# Altium PCB Walrus.PcbDoc (part 1 of 3)
Units mm, origin at the board's own origin, x right, y up, seen from the top; angles counter-clockwise.
Board outline 65 x 30.33 mm, 2 copper layers (Top, Bottom), stack 1.545 mm thick; 106 components, 76 nets, 395 pads, 305 vias.
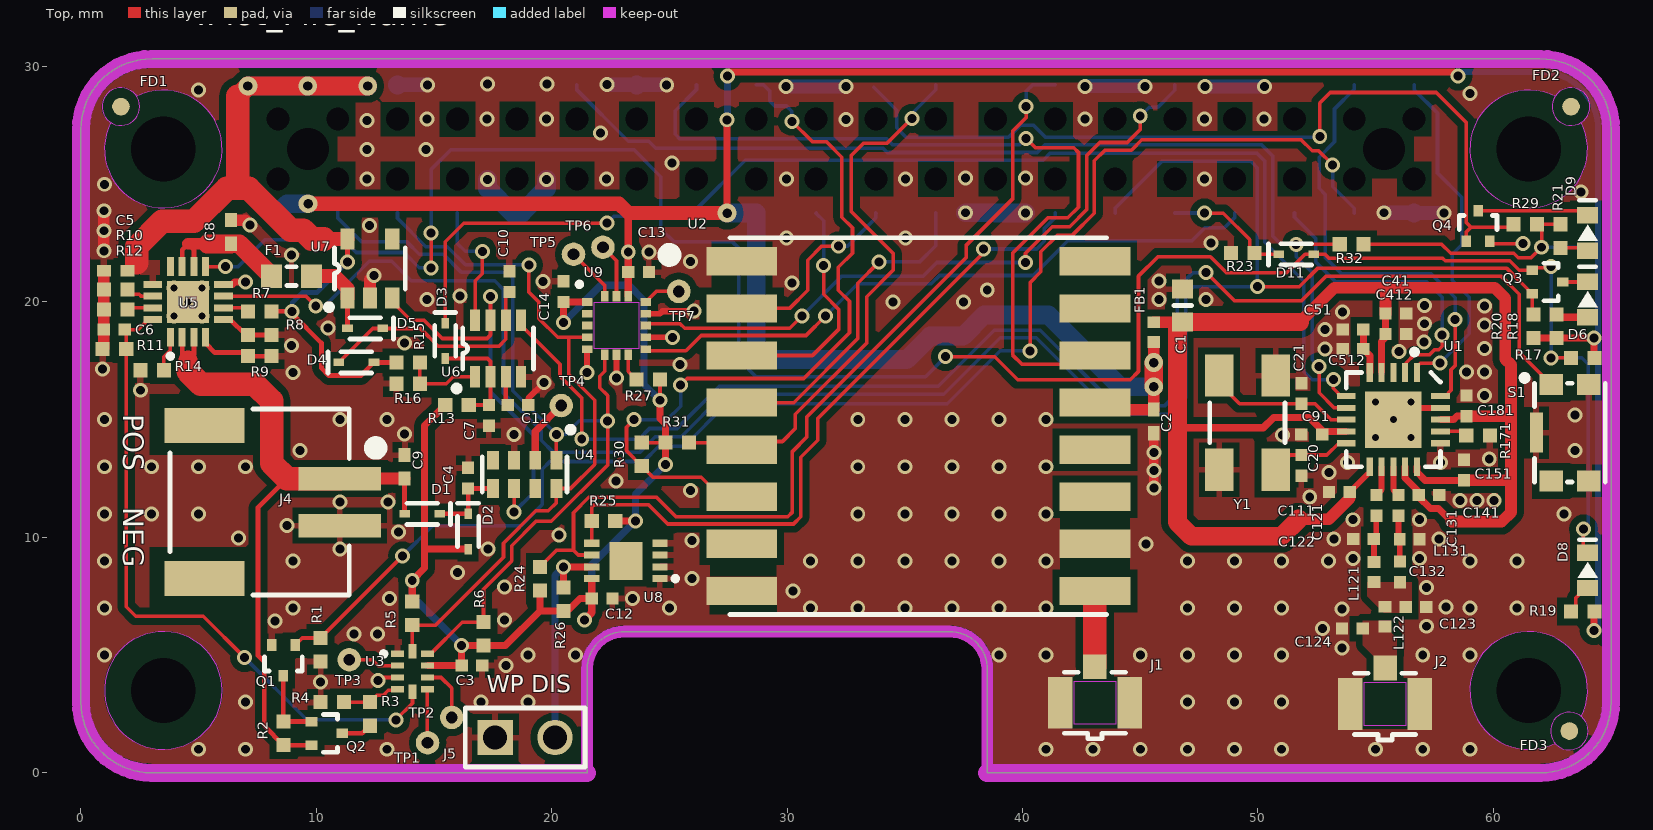
[diagram p0: Top view]
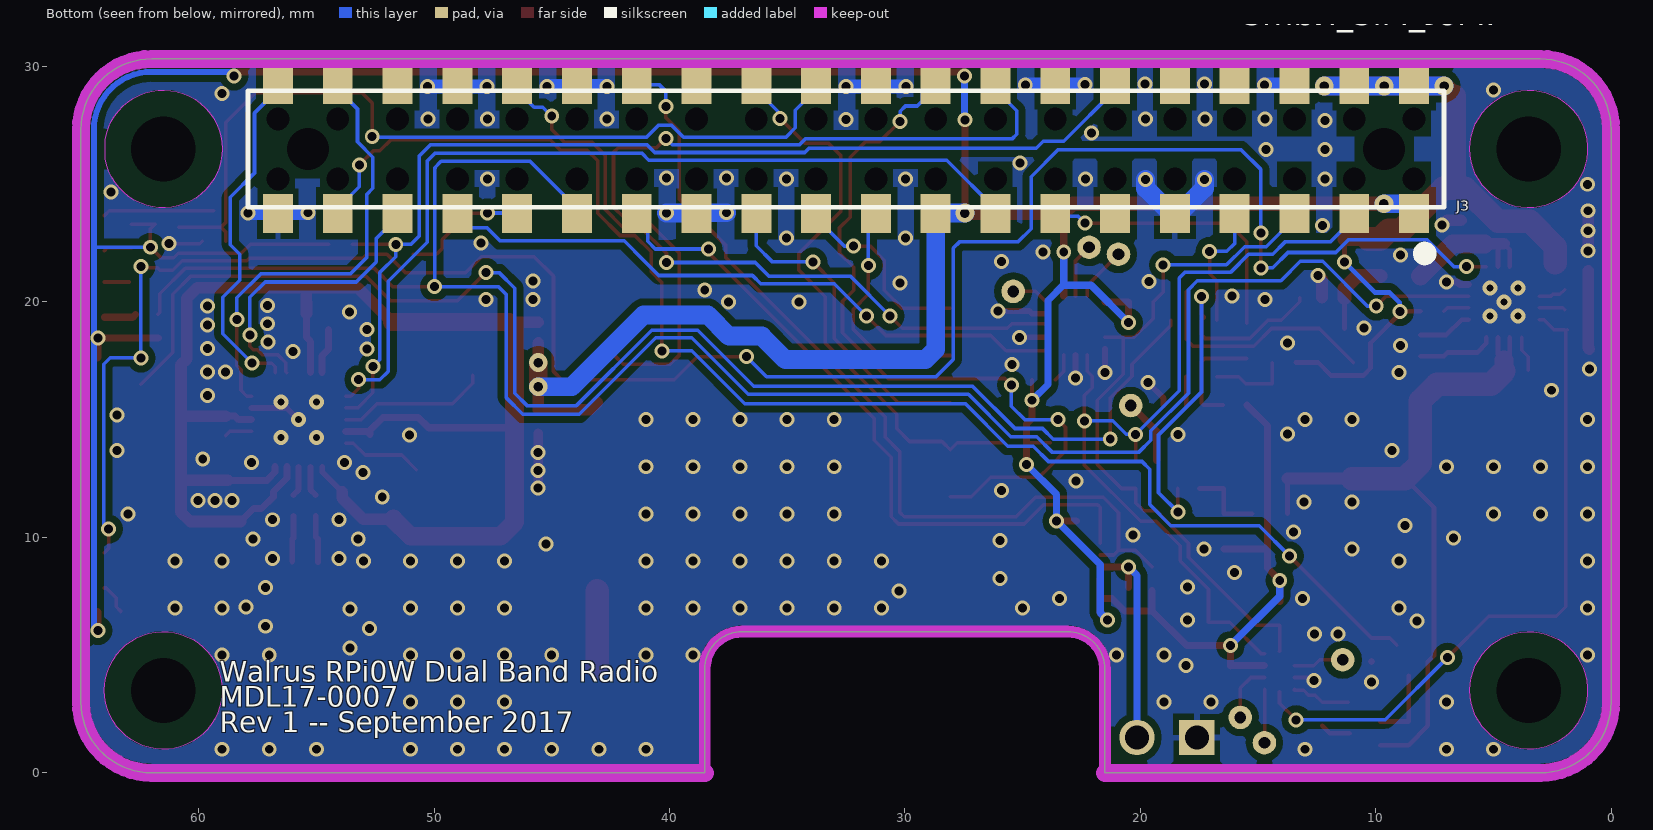
[diagram p1: Bottom view, seen from below]
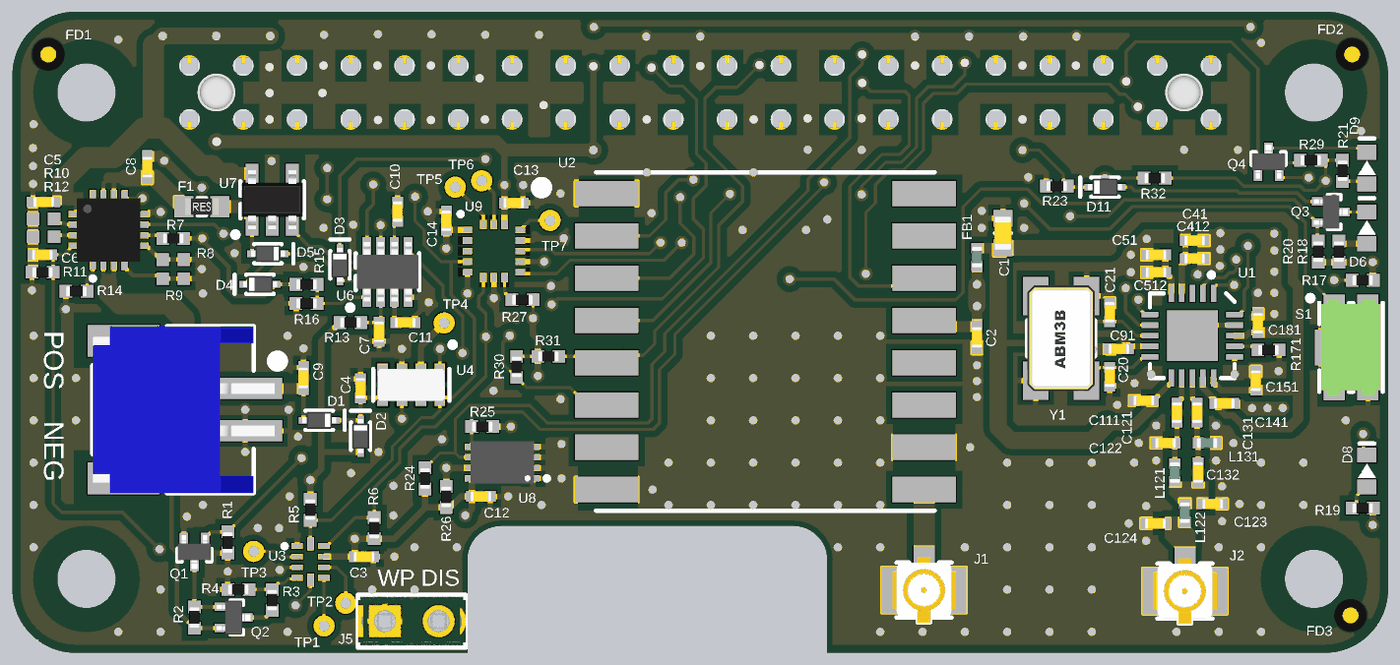
[diagram p3: 3D render of the assembled board from above, using the file's embedded part models]

## Layer stack, top to bottom
Top Solder: solder mask 0.02, Green, Gloss, Dk 4.71
Top: signal copper 0.035
Preg: core 1.475, FR4, Dk 4.2
Bottom: signal copper 0.035
Bottom Solder: solder mask 0.02, Green, Gloss, Dk 4.71

## Board outline
3,0 cw(c3,3) 0,3 0,27.325 cw(c3,27.325) 3,30.325 62,30.325 cw(c62,27.325) 65,27.325 65,3 cw(c62,3) 62,0 38.5,0 38.5,4.412 ccw(c36.912,4.412) 36.912,6 23.088,6 ccw(c23.088,4.412) 21.5,4.412 21.5,0

## Design rules (kind name [scope] priority, off if disabled: settings)
AssemblyTestPointUsage [All] p1: valid=2
AssemblyTestpoint [All] p1: testpointundercomponent=TRUE minsize=0.7 maxsize=2 preferedsize=0.8 minholesize=0 maxholesize=1 preferedholesize=0.4 testpointgrid=0.025 usegrid=FALSE gridtolerance=0 allowsidebottom=TRUE minspacing=0.75
Clearance "Copper to PTH" [InPadClass('MTGH')] p1: gap=0.255 ignorepadtopadclearanceinfootprint=FALSE except(0: Arc-Hole Track-Hole SMDPad-Hole THPad-Hole Via-Hole Fill-Hole Poly-Hole Region-Hole Text-Hole)
Clearance "Copper to NPTH" [IsPad and (HoleDiameter > 0) and (((HoleDiameter + 0.254) > PadXSize_AllLayers) or ((HoleDiameter + 0.254) > PadYSize_AllLayers))] p2: gap=0.152 ignorepadtopadclearanceinfootprint=FALSE
Clearance "Copper to Keepout" [IsRegion or istrack or isarc or ispad or isvia vs (OnLayer('Keep-Out Layer') or (IsKeepOut))] p3: gap=0.001 ignorepadtopadclearanceinfootprint=FALSE except(0: Arc-Hole Track-Hole SMDPad-Hole THPad-Hole Via-Hole Fill-Hole Poly-Hole Region-Hole Text-Hole)
Clearance "Clearance Copper Pour_TP_Pad" [isregion vs InComponentClass('Test_Point_0.75')] p4: gap=0.152 ignorepadtopadclearanceinfootprint=FALSE except(0: Arc-Hole Track-Hole SMDPad-Hole THPad-Hole Via-Hole Fill-Hole Poly-Hole Region-Hole Text-Hole)
Clearance "Test Point 0.75 to 0.75" [(InComponentClass('Test_Point_0.75')) vs (InComponentClass('Test_Point_0.75'))] p5: gap=1.25 ignorepadtopadclearanceinfootprint=FALSE except(0: Arc-Hole Track-Hole SMDPad-Hole THPad-Hole Via-Hole Fill-Hole Poly-Hole Region-Hole Text-Hole)
Clearance "Clearance Copper Pour" [IsRegion] p6: gap=0.3 ignorepadtopadclearanceinfootprint=FALSE
Clearance "Clearance Copper Pour_SMD_Pad" [isregion vs issmtpin] p7: gap=0.25 ignorepadtopadclearanceinfootprint=FALSE
Clearance "Clearance Primary" [All] p8: gap=0.152 ignorepadtopadclearanceinfootprint=TRUE
Clearance "Clearance Copper Pour_TH_Pad" [IsRegion vs IsThruPin] p9: gap=0.3 ignorepadtopadclearanceinfootprint=FALSE except(0: Arc-Hole Track-Hole SMDPad-Hole THPad-Hole Via-Hole Fill-Hole Poly-Hole Region-Hole Text-Hole)
Clearance Keepout [(OnLayer('Keep-Out Layer') or (IsKeepOut))] p10: gap=0.01 ignorepadtopadclearanceinfootprint=FALSE except(0: Arc-Hole Track-Hole SMDPad-Hole THPad-Hole Via-Hole Fill-Hole Poly-Hole Region-Hole Text-Hole)
ComponentClearance "Component to Component" [IsComponent vs IsComponent] p1: gap=0 collisioncheckmode=3 verticalgap=0 showdistances=FALSE
ComponentClearance [All] p2: gap=0.2 collisioncheckmode=3 verticalgap=0.1 showdistances=TRUE
HoleSize [All] p1: absolutevalues=TRUE maxlimit=10 minlimit=0.3 maxpercent=80.000 minpercent=20.000
HoleToHoleClearance [All] p1: gap=0.25 allowstackedmicrovias=TRUE
MinimumSolderMaskSliver MinimumSolderMaskSliver_BGA [InComponentClass('BGA')] p1: minsoldermaskwidth=0.05
MinimumSolderMaskSliver [All] p2: minsoldermaskwidth=0.065
NetAntennae "NetAntennae Solder Jumper" [(InComponent('JP101') OR InComponent('JP103'))] p1: netantennaetolerance=0
NetAntennae [All] p2: netantennaetolerance=0
PlaneClearance [All] p1: clearance=0.75
PlaneConnect [All] p1: planeconnectstyle=Relief reliefexpansion=0.5 reliefentries=4 reliefconductorwidth=0.25 reliefairgap=0.25
PolygonConnect "Polygon Connect RF" [(InComponentClass('RF Component'))] p1: connectstyle=Direct reliefconductorwidth=0.5 reliefentries=4 polygonreliefangle="90 Angle" airgapwidth=0.254
PolygonConnect "Polygon Connect Direct" [(InNetClass('Poly_Direct')) or InComponentClass('DirectPour')] p2: connectstyle=Direct reliefconductorwidth=0.5 reliefentries=4 polygonreliefangle="90 Angle" airgapwidth=0.254
PolygonConnect "Polygon Connect Via" [IsVia] p3: connectstyle=Direct reliefconductorwidth=0.254 reliefentries=4 polygonreliefangle="90 Angle" airgapwidth=0.254
PolygonConnect "Polygon Connect" [All] p4: thpad.connectstyle=Relief thpad.reliefconductorwidth=0.25 thpad.reliefentries=4 thpad.polygonreliefangle="90 Angle" thpad.airgapwidth=0.25 smdpad.connectstyle=Relief smdpad.reliefconductorwidth=0.25 smdpad.reliefentries=4 smdpad.polygonreliefangle="90 Angle" smdpad.airgapwidth=0.25 via.connectstyle=Direct via.reliefconductorwidth=0.2 via.reliefentries=4 via.polygonreliefangle="90 Angle" via.airgapwidth=0.2
RoutingVias [All] p1: holewidth=0.4 width=0.8 viastyle="Through Hole" minholewidth=0.199 minwidth=0.45 maxholewidth=0.8 maxwidth=1.6
SMDEntry [All] p1 off: side=TRUE corner=TRUE anyangle=FALSE
SilkToSilkClearance [All] p1: silktosilkclearance=0
SilkToSolderMaskClearance SilkscreenOverComponentPads [IsPad] p1 off: minsilkscreentomaskgap=0.025 clearancetoexposedcopper=TRUE
SolderMaskExpansion [All] p1: expansion=0.062
Width "Width 50 Ohm" [InNetClass('RFNet')] p1: maxlimit=0.23 minlimit=0.15 preferedwidth=0.23
Width "Width 3.3V" [(InNet('+3.3V')   or innet('+3.3V_BN'))] p2: maxlimit=10 minlimit=0.16 preferedwidth=0.3
Width [All] p3: maxlimit=10 minlimit=0.075 preferedwidth=0.2
19 further rules are at their usual default settings.

## Classes and differential pairs
component class "Walrus Coversheet": FD1 FD2 FD3
component class "Walrus Main": C3 C4 C12 C13 C14 D1 D2 J3 J5 Q1 Q2 R1 R2 R3 R4 R5 R6 R24 R25 R26 R27 TP1 TP2 TP3 TP4 TP5 TP6 TP7 U3 U4 U8 U9
component class "Walrus Power": C5 C6 C7 C8 C9 C10 C11 D3 D4 D5 D6 D8 D9 D10 D11 F1 J4 Q3 Q4 R7 R8 R9 R10 R11 R12 R13 R14 R15 R16 R17 R18 R19 R20 R21 R23 R29 S1 U5 U6 U7
component class "Walrus Radios": C1 C2 C20 C21 C41 C51 C91 C111 C121 C122 C123 C124 C131 C132 C141 C151 C181 C412 C512 FB1 J1 J2 L121 L122 L131 R30 R31 R32 R171 U1 U2 Y1
component class DirectPour: C2 C21 C41 C51 C91 C111 C122 C123 C124 C141 C151 C181 C412 C512 J1 J2 L131 U2
net class Poly_Direct: RF_2.4GHZ_ANT RF_900MHZ_ANT RF_N_1 RF_P_1 RF_SE

## Components (designator, comment, footprint, x,y, rotation, side; value= is the part's Value field where it differs from the comment)
C1 "1.0µF 16V X7R" CAPC1608X90L(0603) 46.8,19.85 r270 top value=1.0µF
C2 "2.2µF 16V X5R" CAPC1005X60L(0402) 45.575,14.925 r90 top value=2.2µF
C3 "0.1µF 10V X7R" CAPC1005X60L(0402_FLEXTRONICS) 16.615,4.55 r180 top value=0.1µF
C4 "0.1µF 10V X7R" CAPC1005X60L(0402_FLEXTRONICS) 16.45,12.515 r270 top value=0.1µF
C5 "2.2µF 16V X5R" CAPC1005X60L(0402) 1.475,21.325 r0 top value=2.2µF
C6 "0.1µF 10V X7R" CAPC1005X60L(0402_FLEXTRONICS) 1.415,18.825 r0 top value=0.1µF
C7 "0.1µF 10V X7R" CAPC1005X60L(0402_FLEXTRONICS) 17.325,15.185 r90 top value=0.1µF
C8 "4.7µF 6.3V X5R" CAPC1005X60L(0402) 6.375,22.975 r270 top value=4.7µF
C9 "4.7µF 6.3V X5R" CAPC1005X60L(0402) 13.75,13 r270 top value=4.7µF
C10 "0.1µF 10V X7R" CAPC1005X60L(0402_FLEXTRONICS) 18.2,20.865 r270 top value=0.1µF
C11 "1.0µF 10V X5R" CAPC1005X60L(0402_FLEXTRONICS) 18.565,15.625 r180 top value=1.0µF
C12 "0.1µF 10V X7R" CAPC1005X60L(0402_FLEXTRONICS) 22.14,7.4 r180 top value=0.1µF
C13 "0.1µF 10V X7R" CAPC1005X60L(0402_FLEXTRONICS) 23.69,21.275 r180 top value=0.1µF
C14 "0.1µF 10V X7R" CAPC1005X60L(0402_FLEXTRONICS) 20.5,20.44 r270 top value=0.1µF
C20 "15pF 50V C0G/NP0" CAPC1005X60L(0402_FLEXTRONICS) 51.85,13.06 r90 top value=15pF
C21 "15pF 50V C0G/NP0" CAPC1005X60L(0402_FLEXTRONICS) 51.85,16.115 r270 top value=15pF
C41 "0.1µF 10V X7R" CAPC1005X60L(0402_FLEXTRONICS) 55.86,19.5 r180 top value=0.1µF
C51 "0.1µF 10V X7R" CAPC1005X60L(0402_FLEXTRONICS) 54.035,18.825 r0 top value=0.1µF
C91 "220pF 50V X7R" CAPC1005X60L(0402_FLEXTRONICS) 52.285,14.375 r0 top value=220pF
C111 "0.1µF 10V X7R" CAPC1005X60L(0402_FLEXTRONICS) 53.46,11.925 r0 top value=0.1µF
C121 "100pF 50V C0G/NP0" CAPC1005X60L(0402_FLEXTRONICS) 55.025,11.36 r270 top value=100pF
C122 "1.0pF 50V C0G/NP0" CAPC1005X60L(0402_FLEXTRONICS) 54.485,9.925 r0 top value=1.0pF
C123 "1.8pF 50V C0G/NP0" CAPC1005X60L(0402_FLEXTRONICS) 56.715,7.05 r180 top value=1.8pF
C124 "1.5pF 50V C0G/NP0" CAPC1005X60L(0402_FLEXTRONICS) 54.01,6.125 r0 top value=1.5pF
C131 "100pF 50V C0G/NP0" CAPC1005X60L(0402_FLEXTRONICS) 55.975,11.36 r270 top value=100pF
C132 "1.0pF 50V C0G/NP0" CAPC1005X60L(0402_FLEXTRONICS) 56.025,8.535 r270 top value=1.0pF
C141 "0.1µF 10V X7R" CAPC1005X60L(0402_FLEXTRONICS) 57.265,11.8 r180 top value=0.1µF
C151 "220pF 50V X7R" CAPC1005X60L(0402_FLEXTRONICS) 58.75,12.865 r270 top value=220pF
C181 "220pF 50V X7R" CAPC1005X60L(0402_FLEXTRONICS) 58.85,15.59 r270 top value=220pF
C412 "47pF 50V C0G/NP0" CAPC1005X60L(0402_FLEXTRONICS) 55.86,18.65 r180 top value=47pF
C512 "47pF 50V C0G/NP0" CAPC1005X60L(0402_FLEXTRONICS) 54.035,18 r0 top value=47pF
D1 "RB520S30T1G" SODFL1608X70L(SOD-523) 14.5,11 r180 top
D2 "RB520S30T1G" SODFL1608X70L(SOD-523) 16.45,10.25 r270 top
D3 "RB520S30T1G" SODFL1608X70L(SOD-523) 15.475,18.35 r270 top
D4 "RB520S30T1G" SODFL1608X70L(SOD-523) 11.7,17.43 r0 top
D5 "RB520S30T1G" SODFL1608X70L(SOD-523) 12.075,18.875 r180 top
D6 "GREEN" DIOC1608X90L(0603)_GREEN 64,20.1 r270 top
D8 "RED" DIOC1608X90L(0603)_RED 64,8.6 r270 top
D9 "BLUE" DIOC1608X90L(0603)_BLUE 64,22.925 r270 top
D11 "RB520S30T1G" SODFL1608X70L(SOD-523) 51.625,22.025 r0 top
F1 "0.75A Hold,1.5A Trip" FUSC1608X60N(0603) 8.95,21.1 r0 top value=0.75A
FB1 "1000ohms ±25% @100MHz" FBDC1005X60L(0402) 45.575,18.72 r270 top value=1000ohms
FD1 "Fiducial, Single Side, 0.75mm Land" FD75 1.7,28.3 r0 top locked
FD2 "Fiducial, Single Side, 0.75mm Land" FD75 63.3,28.3 r0 top locked
FD3 "Fiducial, Single Side, 0.75mm Land" FD75 63.225,1.775 r0 top
J1 "U.FL-R-SMT-1" HIROSE_U.FL-R-SMT-1 43.075,2.975 r180 top
J2 "U.FL-R-SMT-1" HIROSE_U.FL-R-SMT-1 55.4,2.925 r180 top
J3 "HLE-120-02-G-DV-A" SAMTEC_HLE-120-02-G-DV-A 32.5,26.5 r0 bottom locked
J4 "S2B-PH-SM4-TB" JST_S2B-PH-SM4-TB 7.6,11.5 r90 top
J5 "22-28-4023" MOLEX_22-28-4023 18.87,1.5 r0 top
L121 "1.2nH ±0.3nH" INDC1005X60L(0402) 54.925,8.53 r270 top value=1.2nH
L122 "1.2nH ±0.3nH" INDC1005X60L(0402) 55.4,6.63 r270 top value=1.2nH
L131 "1.2nH ±0.3nH" INDC1005X60L(0402) 56.445,9.925 r180 top value=1.2nH
Q1 "NTA7002NT1G" "SOT50P160X90-3L(SOT416, SC75)" 8.6,4.775 r270 top
Q2 "NTA4151PT1G" "SOT50P160X90-3L(SOT416, SC75)" 10.45,1.675 r0 top
Q3 "NTA7002NT1G" "SOT50P160X90-3L(SOT416, SC75)" 62.3,20.85 r0 top
Q4 "NTA7002NT1G" "SOT50P160X90-3L(SOT416, SC75)" 59.35,23.225 r90 top
R1 "100K ±1%" RESC1005X40L(0402) 10.175,5.225 r90 top value=100K
R2 "100K ±1%" RESC1005X40L(0402) 8.6,1.675 r270 top value=100K
R3 "3.6K ±1%" RESC1005X40L(0402) 12.275,2.5 r270 top value=3.6K
R4 "3.40K ±1%" RESC1005X40L(0402) 10.675,3 r0 top value=3.40K
R5 "1.8K ±1%" RESC1005X40L(0402) 14.075,6.775 r90 top value=1.8K
R6 "1.8K ±1%" RESC1005X40L(0402) 17.1,5.9 r270 top value=1.8K
R7 "10.0K ±1%" RESC1005X40L(0402) 7.6,19.6 r180 top value=10.0K
R8 "DNP" RESC1005X40L(0402)_DNP 7.6,18.6 r180 top
R9 "DNP" RESC1005X40L(0402)_DNP 7.6,17.7 r180 top
R10 "DNP" RESC1005X40L(0402)_DNP 1.475,20.525 r0 top
R11 "1.8K ±1%" RESC1005X40L(0402) 1.425,18 r0 top value=1.8K
R12 "DNP" RESC1005X40L(0402)_DNP 1.475,19.675 r0 top
R13 "4.99K ±1%" RESC1005X40L(0402) 15.975,15.625 r180 top value=4.99K
R14 "10.0K ±1%" RESC1005X40L(0402) 3.025,17.1 r0 top value=10.0K
R15 "680K ±1%" RESC1005X40L(0402) 13.9,17.425 r180 top value=680K
R16 "240K ±1%" RESC1005X40L(0402) 13.9,16.525 r0 top value=240K
R17 "4.99K ±1%" RESC1005X40L(0402) 63.8,17.625 r0 top value=4.99K
R18 "191 ±1%" RESC1005X40L(0402) 62.675,18.975 r270 top value=191
R19 "160 ±1%" RESC1005X40L(0402) 63.8,6.85 r0 top value=160
R20 "4.99K ±1%" RESC1005X40L(0402) 61.7,18.975 r270 top value=4.99K
R21 "22.0 ±1%" RESC1005X40L(0402) 62.85,22.8 r90 top value=22.0
R23 "100K ±1%" RESC1005X40L(0402) 49.35,22.075 r0 top value=100K
R24 "1.8K ±1%" RESC1005X40L(0402) 19.5,8.25 r270 top value=1.8K
R25 "1.8K ±1%" RESC1005X40L(0402) 22.2,10.7 r0 top value=1.8K
R26 "1.8K ±1%" RESC1005X40L(0402) 20.5,7.375 r270 top value=1.8K
R27 "1.8K ±1%" RESC1005X40L(0402) 24.1,16.7 r0 top value=1.8K
R29 "100K ±1%" RESC1005X40L(0402) 61.35,23.3 r0 top value=100K
R30 "100K ±1%" RESC1005X40L(0402) 23.825,13.525 r90 top value=100K
R31 "4.99K ±1%" RESC1005X40L(0402) 25.325,14.025 r180 top value=4.99K
R32 "4.99K ±1%" RESC1005X40L(0402) 53.975,22.45 r0 top value=4.99K
R171 "56K ±1%" RESC1005X40L(0402) 59.35,14.325 r180 top value=56K
S1 "KMR221GLFS" KMR221GLFS 63.25,14.45 r90 top
TP1 "Test Point, Through Hole, 1.0mm Pad, 0.5mm Hole" TP100P50D 14.725,1.275 r0 top
TP2 "Test Point, Through Hole, 1.0mm Pad, 0.5mm Hole" TP100P50D 15.75,2.35 r0 top
TP3 "Test Point, Through Hole, 1.0mm Pad, 0.5mm Hole" TP100P50D 11.4,4.8 r0 top
TP4 "Test Point, Through Hole, 1.0mm Pad, 0.5mm Hole" TP100P50D 20.4,15.6 r0 top
TP5 "Test Point, Through Hole, 1.0mm Pad, 0.5mm Hole" TP100P50D 20.925,22.025 r90 top
TP6 "Test Point, Through Hole, 1.0mm Pad, 0.5mm Hole" TP100P50D 22.175,22.325 r90 top
TP7 "Test Point, Through Hole, 1.0mm Pad, 0.5mm Hole" TP100P50D 25.4,20.45 r90 top
U1 "CC2500" QFN50P400X400X100-21N(CC2500) 55.75,15 r270 top
U2 "RFM69HCW-915" RFM69HCW 35.575,14.725 r0 top
U3 "ADS1015" QFN50P200X150X40-10(RUG_R-PQFP-N10) 14.085,4.3 r0 top
U4 "M41T62LC" LCC90P320X150X80-8N(M41T62) 18.85,12.675 r270 top
U5 "bq24232" QFN50P300X300X100-17N(bq24232) 4.55,20 r90 top
U6 "LTC2955T-2" SOT65P280X100-8L(TSOT23-8) 17.725,18.02 r90 top
U7 "LTC4411" "SOT95P280X100-5L(TSOT23 -5)" 12.275,21.425 r90 top
U8 "CAT24C32" SON50P300X200X55-8L(UDFN-8) 23.15,9 r180 top
U9 "LIS3DH" LGA50P300X300X100-16N(LGA16) 22.75,19 r0 top
Y1 "26.000MHz ±10ppm 10pF" XTAL500X320X110-4N(ABM3B) 49.55,14.875 r180 top value=26.000MHz

## Footprints (in the part's own frame and the unit in brackets; to place one, negate y for a bottom-side part, rotate by r counter-clockwise, add the part's x,y. Pads: shape width x height; smd on the part's side, far side on the other; paste and mask are expansions set on the pad)
CAPC1005X60L(0402) [mm] "Chip Capacitor, Body 1.0x0.5mm, IPC High Density"
  rect 0.6x0.5 smd: 1(-0.5,0) 2(0.5,0)
  body extent -0.5,-0.25 0.5,0.25, height 0.6
CAPC1005X60L(0402_FLEXTRONICS) [mm] "Chip Capacitor, Body 1.0x0.5mm, Flextronics Design Rules"
  rect 0.525x0.51 smd: 1(-0.44,0) 2(0.44,0)
  body extent -0.5,-0.25 0.5,0.25, height 0.6
CAPC1608X90L(0603) [mm] "Chip Capacitor, Body 1.6x0.8mm, IPC High Density"
  rect 0.8x0.9 smd: 1(-0.7,0) 2(0.7,0)
  silkscreen extent 0,-0.38 0,0.38, body extent -0.8,-0.4 0.8,0.4, height 0.86
DIOC1608X90L(0603)_BLUE [mm] "Chip Diode, Body 1.6x0.8mm, IPC High Density"
  rect 0.7x0.9 smd: 1(-0.75,0) 2(0.75,0)
  silkscreen extent -1.4,-0.43 0.33,0.43, body extent -0.85,-0.45 0.85,0.45, height 0.9
DIOC1608X90L(0603)_GREEN [mm] "Chip Diode, Body 1.6x0.8mm, IPC High Density"
  rect 0.7x0.9 smd: 1(-0.75,0) 2(0.75,0)
  silkscreen extent -1.4,-0.43 0.33,0.43, body extent -0.85,-0.45 0.85,0.45, height 0.9
DIOC1608X90L(0603)_RED [mm] "Chip Diode, Body 1.6x0.8mm, IPC High Density"
  rect 0.7x0.9 smd: 1(-0.75,0) 2(0.75,0)
  silkscreen extent -1.3,-0.43 0.33,0.43, body extent -0.85,-0.45 0.85,0.45, height 0.9
FBDC1005X60L(0402) [mm] "Chip Bead, Body 1.0x0.5mm, IPC High Density"
  rect 0.5x0.54 smd: 1(-0.42,0) 2(0.42,0)
  body extent -0.5,-0.25 0.5,0.25, height 0.6
FD75 [mm] "Fiducial, Single Side Land, 0.75mm Land"
  round 0.75 smd paste-0.75 mask+0.4: 1(0,0)
  Top keep-out circle w0.05: c0,0 r0.8
  body extent -0.37,-0.37 0.38,0.37, height 0.02
FUSC1608X60N(0603) [mm] "Chip Fuse, Body 1.6x0.8mm, IPC Medium Density"
  rect 0.9x1 smd: 1(-0.85,0) 2(0.85,0)
  silkscreen extent -0.2,-0.4 0.2,0.4, body extent -0.8,-0.4 0.8,0.4, height 0.75
HIROSE_U.FL-R-SMT-1 [mm] "Ultra Small Surface Mount Coaxial Connectors - 1.9mm or 2.4mm Mated Height"
  rect 1x1.05 smd: 1(0,-1.525)
  rect 1.05x2.2 smd: 2(-1.475,0) 3(1.475,0)
  Top keep-out region: -0.9,-0.9 0.9,-0.9 0.9,0.9 -0.9,0.9
  silkscreen extent -1.3,-1.3 1.3,1.53, body extent -1.5,-1.55 1.5,1.55, height 1.25
INDC1005X60L(0402) [mm] "Chip Inductor, Body 1.0x0.5mm, IPC High Density"
  rect 0.5x0.54 smd: 1(-0.42,0) 2(0.42,0)
  body extent -0.5,-0.25 0.5,0.25, height 0.6
JST_S2B-PH-SM4-TB [mm] "PH CONNECTOR/2.0MM Pitch Side Entry"
  rect 1x3.5 smd: 1(1,-3.4) 2(-1,-3.4)
  rect 1.5x3.4 smd: 3(3.25,2.35) 4(-3.25,2.35)
  silkscreen extent -3.95,-5.17 3.95,3.82, body extent -3.95,-4.8 3.95,3.8, height 5.61
KMR221GLFS [mm] "KMR 2 Series Microminiature SMT Top Actuated"
  rect 0.9x1 smd: 1(2.05,0.8) 2(2.05,-0.8) 3(-2.05,0.8) 4(-2.05,-0.8)
  rect 1.7x0.55 smd: 5(0,1.425)
  silkscreen extent -2.1,-1.5 2.45,2.05, body extent -2.3,-1.4 2.3,1.4, height 1.9
LCC90P320X150X80-8N(M41T62) [mm] "LCC, 8-Leads, Body 3.2x1.5mm, Pitch 0.90mm, IPC Medium Density"
  rect 0.8x0.5 smd paste-0.025 mask+0.1: 1(-0.6,1.35) 2(-0.6,0.45) 3(-0.6,-0.45) 4(-0.6,-1.35) 5(0.6,-1.35) 6(0.6,-0.45) 7(0.6,0.45) 8(0.6,1.35)
  silkscreen extent -2.02,-1.8 0.75,2.07, body extent -0.75,-1.6 0.75,1.6, height 0.8
LGA50P300X300X100-16N(LGA16) [mm] "LGA, 16-Leads, Body 3.0x3.0mm, Pitch 0.50mm, IPC Medium Density"
  rect 0.45x0.322 smd paste-0.025 mask+0.05: 1(-1.25,1) 2(-1.25,0.5) 3(-1.25,0) 4(-1.25,-0.5) 5(-1.25,-1) 9(1.25,-1) 10(1.25,-0.5) 11(1.25,0) 12(1.25,0.5) 13(1.25,1)
  rect 0.322x0.45 smd paste-0.025 mask+0.05: 6(-0.5,-1.25) 7(0,-1.25) 8(0.5,-1.25) 14(0.5,1.25) 15(0,1.25) 16(-0.5,1.25)
  Top keep-out region: -0.975,-0.975 0.975,-0.975 0.975,0.975 -0.975,0.975
  silkscreen extent -1.67,1.65 -1.48,1.85, body extent -1.5,-1.5 1.5,1.5, height 1
MOLEX_22-28-4023 [mm] "KK 100 HEADER ASSY FLAT VERTICAL BREAKAWAY"
  rect 1.5x1.5 hole 1.02: 1(-1.27,0)
  round 1.5 hole 1.02: 2(1.27,0)
  silkscreen extent -2.54,-1.25 2.54,1.25, body extent -2.54,-1.24 2.54,1.24, height 8.38
QFN50P200X150X40-10(RUG_R-PQFP-N10) [mm] "QFN, 10-Leads, Body 1.5x2.0mm, Pitch 0.50mm, TI Footprint"
  rect 0.55x0.28 smd paste-0.025 mask+0.062: 1(-0.635,0.75) 4(-0.635,-0.75) 6(0.635,-0.75) 9(0.635,0.75)
  rect 0.55x0.26 smd paste-0.025 mask+0.062: 2(-0.635,0.25) 3(-0.635,-0.25) 7(0.635,-0.25) 8(0.635,0.25)
  rect 0.32x0.63 smd paste-0.025 mask+0.062: 5(0,-0.86) 10(0,0.86)
  silkscreen extent -1.32,0.65 -1.12,0.85, body extent -0.75,-1 0.75,1, height 0.4
QFN50P300X300X100-17N(bq24232) [mm] "QFN, 16-Leads, Body 3.0x3.0mm, Pitch 0.50mm, Thermal Tab, IPC Medium Density"
  rect 0.7x0.7 on Top Paste: 0(-0.45,-0.45) 1(0.45,-0.45) 2(-0.45,0.45) 3(0.45,0.45)
  rect 0.8x0.3 smd paste-0.025 mask+0.062: 1(-1.5,0.75) 2(-1.5,0.25) 3(-1.5,-0.25) 4(-1.5,-0.75) 9(1.5,-0.75) 10(1.5,-0.25) 11(1.5,0.25) 12(1.5,0.75)
  rect 0.3x0.8 smd paste-0.025 mask+0.062: 5(-0.75,-1.5) 6(-0.25,-1.5) 7(0.25,-1.5) 8(0.75,-1.5) 13(0.75,1.5) 14(0.25,1.5) 15(-0.25,1.5) 16(-0.75,1.5)
  rect 1.8x1.8 smd paste-3 mask+0.062: 17(0,0)
  silkscreen extent -2.4,0.65 -2.2,0.85, body extent -1.5,-1.5 1.5,1.5, height 1
QFN50P400X400X100-21N(CC2500) [mm] "QFN, 20-Leads, Body 4.0x4.0mm, Pitch 0.50mm, IPC Medium Density"
  rect 0.8x0.26 smd: 1(-2,1) 2(-2,0.5) 3(-2,0) 4(-2,-0.5) 5(-2,-1) 11(2,-1) 12(2,-0.5) 13(2,0) 14(2,0.5) 15(2,1)
  rect 0.26x0.8 smd: 6(-1,-2) 7(-0.5,-2) 8(0,-2) 9(0.5,-2) 10(1,-2) 16(1,2) 17(0.5,2) 18(0,2) 19(-0.5,2) 20(-1,2)
  rect 2.4x2.4 smd: 21(0,0)
  silkscreen extent -2.97,-2 2,2, body extent -2,-2 2,2, height 1
RESC1005X40L(0402) [mm] "Chip Resistor, Body 1.1x0.5mm, IPC High Density"
  rect 0.6x0.6 smd: 1(-0.5,0) 2(0.5,0)
  body extent -0.5,-0.25 0.5,0.25, height 0.4
RESC1005X40L(0402)_DNP [mm] "Chip Resistor, Body 1.1x0.5mm, IPC High Density"
  rect 0.6x0.6 smd: 1(-0.5,0) 2(0.5,0)
RFM69HCW [mm] "Hope RF, ISM TRANSCEIVER MODULE"
  rect 3x1.2 smd: 1(-7.5,7) 2(-7.5,5) 3(-7.5,3) 4(-7.5,1) 5(-7.5,-1) 6(-7.5,-3) 7(-7.5,-5) 8(-7.5,-7) 9(7.5,-7) 10(7.5,-5) 11(7.5,-3) 12(7.5,-1) 13(7.5,1) 14(7.5,3) 15(7.5,5) 16(7.5,7)
  silkscreen extent -10.83,-8 8,8, body extent -8,-8 8,8, height 1
SAMTEC_HLE-120-02-G-DV-A [mm] "0.100\" Tiger Beam™ Cost-effective Single Beam Socket Strip"
  rect 1.27x1.65 smd: 1(-24.13,2.735) 3(-21.59,2.735) 5(-19.05,2.735) 7(-16.51,2.735) 9(-13.97,2.735) 11(-11.43,2.735) 13(-8.89,2.735) 15(-6.35,2.735) 17(-3.81,2.735) 19(-1.27,2.735) 21(1.27,2.735) 23(3.81,2.735) 25(6.35,2.735) 27(8.89,2.735) 29(11.43,2.735) 31(13.97,2.735) 33(16.51,2.735) 35(19.05,2.735) 37(21.59,2.735) 39(24.13,2.735)
  rect 1.27x1.52 smd: 2(-24.13,-2.675) 4(-21.59,-2.675) 6(-19.05,-2.675) 8(-16.51,-2.675) 10(-13.97,-2.675) 12(-11.43,-2.675) 14(-8.89,-2.675) 16(-6.35,-2.675) 18(-3.81,-2.675) 20(-1.27,-2.675) 22(1.27,-2.675) 24(3.81,-2.675) 26(6.35,-2.675) 28(8.89,-2.675) 30(11.43,-2.675) 32(13.97,-2.675) 34(16.51,-2.675) 36(19.05,-2.675) 38(21.59,-2.675) 40(24.13,-2.675)
  rect 0x0 hole 1.78 unplated mask+0.1: ALGN(-22.86,0) ALGN(22.86,0)
  round 0 hole 0.97 unplated mask+0.1: PASS(-24.13,-1.27) PASS(-21.59,-1.27) PASS(-21.59,1.27) PASS(-19.05,-1.27) PASS(-19.05,1.27) PASS(-16.51,-1.27) PASS(-16.51,1.27) PASS(-13.97,-1.27) PASS(-13.97,1.27) PASS(-11.43,-1.27) PASS(-11.43,1.27) PASS(-8.89,-1.27) PASS(-8.89,1.27) PASS(-6.35,-1.27) PASS(-6.35,1.27) PASS(-3.81,-1.27) PASS(-3.81,1.27) PASS(-1.27,-1.27) PASS(-1.27,1.27) PASS(1.27,-1.27) PASS(1.27,1.27) PASS(3.81,-1.27) PASS(3.81,1.27) PASS(6.35,-1.27) PASS(6.35,1.27) PASS(8.89,-1.27) PASS(8.89,1.27) PASS(11.43,-1.27) PASS(11.43,1.27) PASS(13.97,-1.27) PASS(13.97,1.27) PASS(16.51,-1.27) PASS(16.51,1.27) PASS(19.05,-1.27) PASS(19.05,1.27) PASS(21.59,-1.27) PASS(21.59,1.27) PASS(24.13,-1.27) PASS(24.13,1.27)
  rect 0x0 hole 0.97 unplated mask+0.1: PASS(-24.13,1.27)
  silkscreen extent -25.4,-2.48 25.4,4.69, body extent -25.4,-3.29 25.4,3.29, height 3.66
SODFL1608X70L(SOD-523) [mm] "SOD-523, IPC High Density"
  rect 0.45x0.32 smd: 1(-0.75,0) 2(0.75,0)
  silkscreen extent -1.2,-0.45 0.65,0.45, body extent -0.8,-0.4 0.8,0.4, height 0.7
SON50P300X200X55-8L(UDFN-8) [mm] "UDFN, 8-Leads, Body 3x2mm, Pitch 0.50mm, IPC High Density"
  rect 0.65x0.3 smd paste-0.025 mask+0.05: 1(-1.45,0.75) 2(-1.45,0.25) 3(-1.45,-0.25) 4(-1.45,-0.75) 5(1.45,-0.75) 6(1.45,-0.25) 7(1.45,0.25) 8(1.45,0.75)
  rect 1.4x1.6 smd paste-0.025 mask+0.05: 9(0,0)
  silkscreen extent -2.2,0.65 -2,0.85, body extent -1.5,-1 1.5,1, height 0.55
"SOT50P160X90-3L(SOT416, SC75)" [mm] "SOT416/SC75, 3-Leads, Body 1.6x0.8mm, Pitch 0.50mm, IPC High Density"
  rect 0.5x0.4 smd: 1(-0.65,0.5) 2(-0.65,-0.5) 3(0.65,0)
  silkscreen extent -0.15,-0.8 0.45,0.8, body extent -0.8,-0.8 0.8,0.8, height 0.9
SOT65P280X100-8L(TSOT23-8) [mm] "SOT23-8, 8-Leads, Body 2.9x1.63mm, Pitch 0.65mm, IPC High Density"
  rect 0.9x0.425 smd: 1(-1.2,0.975) 2(-1.2,0.325) 3(-1.2,-0.325) 4(-1.2,-0.975) 5(1.2,-0.975) 6(1.2,-0.325) 7(1.2,0.325) 8(1.2,0.975)
  silkscreen extent -1.82,-1.5 0.87,1.89, body extent -1.4,-1.45 1.4,1.45, height 1
"SOT95P280X100-5L(TSOT23 -5)" [mm] "SOT23-5, 5-Leads, Body 2.9x1.63mm, Pitch 0.95mm, IPC High Density"
  rect 0.9x0.6 smd: 1(-1.25,0.95) 2(-1.25,0) 3(-1.25,-0.95) 4(1.25,-0.95) 5(1.25,0.95)
  silkscreen extent -1.77,-1.5 0.87,1.86, body extent -1.4,-1.45 1.4,1.45, height 1
TP100P50D [mm] "Test Point, Through Hole, 1.00mm Pad, 0.5mm Hole"
  round 1 hole 0.5: 1(0,0)
XTAL500X320X110-4N(ABM3B) [mm] "FOX FQ7050B SMT Crystal, 4-Leads, Body 5.0x3.2mm, IPC Medium Density"
  rect 1.2x1.8 smd: 1(-1.2,2) 2(-1.2,-2) 3(1.2,-2) 4(1.2,2)
  silkscreen extent -1.6,-0.85 1.6,0.85, body extent -1.6,-2.5 1.6,2.5, height 1.1

## Part data
C1: library part CAP_000045, "Ceramic Chip Capacitor", Case=1608(0603), Dielectric=Ceramic, Mfg1PartNumber=EMK107B7105KA-T, OperatingTemp="-55C to 125C", Tempco=X7R, Tolerance=±10%, Voltage=16V, ComponentLink1Description="Mfg1 Datasheet", ComponentLink1URL=http://www.yuden.co.jp/ut/product/pdf/djmk_e.pdf, CreationDate=11/3/2010, Creator="R. Casciola", Distributor=https://www.digikey.com/product-detail/en/taiyo-yuden/EMK107B7105KA-T/587-1241-1-ND/931018, Height=0.90mm(34.4mils), LeadFree=True, MDLPartNumber=CAP_000045, Mfg1="Taiyo Yuden", Mounting=SMT, Packaging=T&R, RoHS=True
C2 C5: library part CAP_000166, "Ceramic Chip Capacitor", Case=1005(0402), Mfg1PartNumber=C1005X5R1C225K050BC, OperatingTemp="-55C to 85C", Tempco=X5R, Tolerance=±10%, Voltage=16V, ComponentLink1Description="Mfg1 Datasheet", ComponentLink1URL=http://product.tdk.com/capacitor/mlcc/en/documents/mlccspec_commercial_general_midvoltage_en.pdf, CreationDate=3/17/2013, Creator="R. Casciola", Dialectric=Ceramic, Distributor=https://www.digikey.com/product-detail/en/tdk-corporation/C1005X5R1C225K050BC/445-9085-1-ND/3661600, Height=0.55mm(21.7mils), LeadFree=True, MDLPartNumber=CAP_000166, Mfg1=TDK, Mounting=SMT, Packaging=T&R, RoHS=True
  C2: ClassName=DirectPour
C3 C4 C6 C7 C10 C12 C13 C14 C41 C51 C111 C141: library part CAP_000208, "Ceramic Chip Capacitor", Case=1005(0402), Dielectric=Ceramic, Mfg1PartNumber=GRM155R71A104KA01D, OperatingTemp="-55C to 125C", Tempco=X7R, Tolerance=±10%, Voltage=10V, ComponentLink1Description="Mfg1 Datasheet", ComponentLink1URL=http://search.murata.co.jp/Ceramy/image/img/A01X/G101/ENG/GRM155R71A104KA01-01.pdf, CreationDate=5/29/2017, Creator="R. Casciola", Distributor=https://www.digikey.com/product-detail/en/murata-electronics-north-america/GRM155R71A104KA01D/490-6321-1-ND/3845518, Height=0.55mm(21.7mils), LeadFree=True, MDLPartNumber=CAP_000208, Mfg1=Murata, Mounting=SMT, Packaging=T&R, RoHS=True
  C41 C51 C111 C141: ClassName=DirectPour
C8 C9: library part CAP_000063, "Ceramic Chip Capacitor", Case=1005(0402), Mfg1PartNumber=GRM155R60J475ME87D, Mfg2PartNumber=JMK105BBJ475MV-F, OperatingTemp="-55C to 85C", Tempco=X5R, Tolerance=±20%, Voltage=6.3V, ComponentLink1Description="Mfg1 Datasheet", ComponentLink1URL=http://www.murata.com/products/catalog/pdf/c02e.pdf, ComponentLink2Description="Mfg2 Datasheet", ComponentLink2URL=http://www.yuden.co.jp/or/product/category/capacitor/JMK105BBJ475MV-F.pdf, CreationDate=1/29/2011, Creator="R. Casciola", Dialectric=Ceramic, Distributor=https://www.digikey.com/product-detail/en/murata-electronics-north-america/GRM155R60J475ME87D/490-5408-1-ND/2175215, Height=0.60mm(23.6mils), LeadFree=True, MDLPartNumber=CAP_000063, Mfg1=Murata, Mfg2="Taiyo Yuden", Mounting=SMT, Packaging=T&R, RoHS=True
C11: library part CAP_000094, "Ceramic Chip Capacitor", Case=1005(0402), Dielectric=Ceramic, Mfg1PartNumber=0402ZD105KAT2A, OperatingTemp="-55C to 85C", Tempco=X5R, Tolerance=±10%, Voltage=10V, ComponentLink1Description="Mfg1 Datasheet", ComponentLink1URL=http://www.avx.com/docs/Catalogs/cx5r.pdf, CreationDate=7/19/2011, Creator="R. Casciola", Distributor=https://www.digikey.com/product-detail/en/avx-corporation/0402ZD105KAT2A/478-4596-1-ND/1645907, Height=0.56mm(22.0mils), LeadFree=True, MDLPartNumber=CAP_000094, Mfg1=AVX, Mounting=SMT, Packaging=T&R, RoHS=True
C20 C21: library part CAP_000179, "Ceramic Chip Capacitor", Case=1005(0402), Dielectric=Ceramic, Mfg1PartNumber=04025A150GAT2A, OperatingTemp="-55C to 125C", Tempco=C0G/NP0, Tolerance=±2%, Voltage=50V, ComponentLink1Description="Mfg1 Datasheet", ComponentLink1URL=http://partbuilder.avx.com/p/pb/pdf/1027/C0GNP0-Dielectric.pdf, CreationDate=1/25/2015, Creator="R. Casciola", Distributor=https://www.digikey.com/product-detail/en/avx-corporation/04025A150GAT2A/478-5268-1-ND/1950935, Height=0.56mm(22.0mils), LeadFree=True, MDLPartNumber=CAP_000179, Mfg1=AVX, Modifer="R. Casciola", ModificationDate=4/15/2016, Mounting=SMT, Packaging=T&R, RoHS=True
  C21: ClassName=DirectPour
C91 C151 C181: library part CAP_000207, "Ceramic Chip Capacitor", Case=1005(0402), Dielectric=Ceramic, Mfg1PartNumber=GRM155R71H221KA01D, OperatingTemp="-55C to 125C", Tempco=X7R, Tolerance=±10%, Voltage=50V, ClassName=DirectPour, ComponentLink1Description="Mfg1 Datasheet", ComponentLink1URL=http://search.murata.co.jp/Ceramy/image/img/A01X/G101/ENG/GRM155R71H221KA01-01.pdf, CreationDate=5/29/2017, Creator="R. Casciola", Distributor=https://www.digikey.com/product-detail/en/murata-electronics-north-america/GRM155R71H221KA01D/490-1298-1-ND/587937, Height=0.55mm(21.7mils), LeadFree=True, MDLPartNumber=CAP_000207, Mfg1=Murata, Mounting=SMT, Packaging=T&R, RoHS=True
C121 C131: library part CAP_000202, "Ceramic Chip Capacitor", Case=1005(0402), Dielectric=Ceramic, Mfg1PartNumber=GRM1555C1H101JA01D, OperatingTemp="-55C to 125C", Tempco=C0G/NP0, Tolerance=±5%, Voltage=50V, ComponentLink1Description="Mfg1 Datasheet", ComponentLink1URL=http://search.murata.co.jp/Ceramy/image/img/A01X/G101/ENG/GRM1555C1H101JA01-01.pdf, CreationDate=5/29/2017, Creator="R. Casciola", Distributor=https://www.digikey.com/product-detail/en/murata-electronics-north-america/GRM1555C1H101JA01D/490-5922-1-ND/3721279, Height=0.55mm(21.7mils), LeadFree=True, MDLPartNumber=CAP_000202, Mfg1=Murata, Mounting=SMT, Packaging=T&R, RoHS=True
C122 C132: library part CAP_000206, "Ceramic Chip Capacitor", Case=1005(0402), Dielectric=Ceramic, Mfg1PartNumber=GRM1555C1H1R0CA01D, OperatingTemp="-55C to 125C", Tempco=C0G/NP0, Tolerance=±0.25pF, Voltage=50V, ComponentLink1Description="Mfg1 Datasheet", CreationDate=5/29/2017, Creator="R. Casciola", Distributor=https://www.digikey.com/product-detail/en/murata-electronics-north-america/GRM1555C1H1R0CA01D/490-3199-1-ND/702740, Height=0.55mm(21.7mils), LeadFree=True, MDLPartNumber=CAP_000206, Mfg1=Murata, Mounting=SMT, Packaging=T&R, RoHS=True
  C122: ClassName=DirectPour, ComponentLink1URL=http://search.murata.co.jp/Ceramy/image/img/A01X/G101/ENG/GRM1555C1H1R5CA01-01.pdf
  C132: ComponentLink1URL=http://search.murata.co.jp/Ceramy/image/img/A01X/G101/ENG/GRM1555C1H1R0CA01-01.pdf
C123: library part CAP_000204, "Ceramic Chip Capacitor", Case=1005(0402), Dielectric=Ceramic, Mfg1PartNumber=GRM1555C1H1R8CA01D, OperatingTemp="-55C to 125C", Tempco=C0G/NP0, Tolerance=±0.25pF, Voltage=50V, ClassName=DirectPour, ComponentLink1Description="Mfg1 Datasheet", ComponentLink1URL=http://search.murata.co.jp/Ceramy/image/img/A01X/G101/ENG/GRM1555C1H1R8CA01-01.pdf, CreationDate=5/29/2017, Creator="R. Casciola", Distributor=https://www.digikey.com/product-detail/en/murata-electronics-north-america/GRM1555C1H1R8CA01D/490-5898-1-ND/3569084, Height=0.55mm(21.7mils), LeadFree=True, MDLPartNumber=CAP_000204, Mfg1=Murata, Mounting=SMT, Packaging=T&R, RoHS=True
C124: library part CAP_000205, "Ceramic Chip Capacitor", Case=1005(0402), Dielectric=Ceramic, Mfg1PartNumber=GRM1555C1H1R5CA01D, OperatingTemp="-55C to 125C", Tempco=C0G/NP0, Tolerance=±0.25pF, Voltage=50V, ClassName=DirectPour, ComponentLink1Description="Mfg1 Datasheet", ComponentLink1URL=http://search.murata.co.jp/Ceramy/image/img/A01X/G101/ENG/GRM1555C1H1R5CA01-01.pdf, CreationDate=5/29/2017, Creator="R. Casciola", Distributor=https://www.digikey.com/product-detail/en/murata-electronics-north-america/GRM1555C1H1R5CA01D/490-5891-1-ND/3481884, Height=0.55mm(21.7mils), LeadFree=True, MDLPartNumber=CAP_000205, Mfg1=Murata, Mounting=SMT, Packaging=T&R, RoHS=True
C412 C512: library part CAP_000193, "Ceramic Chip Capacitor", Case=1005(0402), Dielectric=Ceramic, Mfg1PartNumber=C0402C470K5GACTU, OperatingTemp="-55C to 125C", Tempco=C0G/NP0, Tolerance=±10%, Voltage=50V, ClassName=DirectPour, ComponentLink1Description="Mfg1 Datasheet", ComponentLink1URL=http://capacitoredge.kemet.com/capedge2/intellispec.jsp?pn=C0402C470K5GACTU&displayPN=C0402C470K5GACTU, CreationDate=4/8/2015, Creator="R. Casciola", Distributor=https://www.digikey.com/product-detail/en/kemet/C0402C470K5GACTU/399-7796-1-ND/3471519, Height=0.55mm(22.0mils), LeadFree=True, MDLPartNumber=CAP_000193, Mfg1=Kemet, Mounting=SMT, Packaging=T&R, RoHS=True
D1 D2 D3 D4 D5 D11: library part DIOD_000001, "Schottky Barrier Diode", Case=SOD-523, MaxForwardCurrent (mA)=200mA, MaxForwardVoltage=0.60V@200mA, MaxReverseVoltage=30V, ComponentLink1Description="Mfg1 Datasheet", ComponentLink1URL=http://www.onsemi.com/pub_link/Collateral/RB520S30T1-D.PDF, CreationDate=4/7/2010, Creator="R. Casciola", Distributor=https://www.digikey.com/product-detail/en/on-semiconductor/RB520S30T1G/RB520S30T1GOSCT-ND/964626, Height=0.70mm(27.6mils), LeadFree=True, MaxReverseLeakage=1.0µA, MDLPartNumber=DIOD_000001, Mfg1="ON Seminconductor", Mfg1PartNumber=RB520S30T1G, Mounting=SMT, Packaging=T&R, Pins=2, RoHS=True, Type=Schottky
D6: library part DIOD_000061, "Surface Mounting Chip LED", Case=1608(0603), Color=Green, Mfg1PartNumber=LTST-C190KGKT, ComponentLink1Description="Mfg1 Datasheet", ComponentLink1URL=http://optoelectronics.liteon.com/upload/download/DS22-2000-074/S_110_LTST-C190KGKT.pdf, CreationDate=2/15/2015, Creator="R. Casciola", Distributor=https://www.digikey.com/product-detail/en/lite-on-inc/LTST-C190KGKT/160-1435-1-ND/386814, Height=0.80mm(31.5mils), LeadFree=True, Lense=Clear, MDLPartNumber=DIOD_000061, Mfg1=Lite-On, Mounting=SMT, Packaging=T&R, Pins=2, RoHS=True, Type=LED
D8: library part DIOD_000068, "Surface Mounting Chip LED", Case=1608(0603), Color=Red, MaxForwardCurrent (mA)=40mA, MaxForwardVoltage=2.4@20mA, MaxPower=100mW, MaxReverseVoltage=5V, Mfg1PartNumber=LTST-C190CKT, PeakPulseCurrent=200mA, TypForwardVoltage=1.8V@20mA, ComponentLink1Description="Mfg1 Datasheet", ComponentLink1URL=http://media.digikey.com/pdf/Data%20Sheets/Lite-On%20PDFs/LTST-C190CKT.pdf, CreationDate=8/24/2016, Creator="R. Casciola", Distributor=https://www.digikey.com/product-detail/en/lite-on-inc/LTST-C190CKT/160-1181-1-ND/269253, Height=0.80mm(31.5mils), LeadFree=True, Lense=Clear, MaxReverseLeakage=100µA, MDLPartNumber=DIOD_000068, Mfg1=Lite-On, Mounting=SMT, Packaging=T&R, Pins=2, RoHS=True, Type=LED
D9: library part DIOD_000059, "Surface Mounting Chip LED", Case=1608(0603), Color=Blue, Mfg1PartNumber=LTST-C190TBKT, ComponentLink1Description="Mfg1 Datasheet", ComponentLink1URL=http://optoelectronics.liteon.com/upload/download/DS-22-99-0224/S_110_LTST-C190TBKT(0630).pdf, CreationDate=2/15/2015, Creator="R. Casciola", Distributor=https://www.digikey.com/product-detail/en/lite-on-inc/LTST-C190TBKT/160-1646-1-ND/573586, Height=0.80mm(31.5mils), LeadFree=True, Lense=Clear, MDLPartNumber=DIOD_000059, Mfg1=Lite-On, Mounting=SMT, Packaging=T&R, Pins=2, RoHS=True, Type=LED
F1: library part FUSE_000007, "POLY-FUSE® Resettable PTC, Surface Mount > LoRho Series", Case=1608(0603), Mfg1PartNumber=0603L075SLYR, OperatingTemp="-40C to 85C", ComponentLink1Description="Mfg1 Datasheet", ComponentLink1URL=http://www.littelfuse.com/~/media/electronics/datasheets/resettable_ptcs/littelfuse_ptc_lorho_datasheet.pdf.pdf, CreationDate=8/20/2015, Creator="R. Casciola", Distributor=https://www.digikey.com/product-detail/en/littelfuse-inc/0603L075SLYR/F5777CT-ND/3661919, Height=0.75mm(29.5mils), I_hold="0.75A @ 20C", I_max=50A, I_trip="1.5A @ 20C", LeadFree=True, MDLPartNumber=FUSE_000007, Mfg1=Littelfuse, Mounting=SMT, P_d="0.6W @ 20C", Packaging=T&R, R1_max="0.25 ohms @ 20C", R_min="0.05 ohms @ 20C", RoHS=True, V_max=6
FB1: library part FB_000009, "GHz Noise Suppression Chip Ferrite Bead", Case=1005(0402), Current(max)=250mA, DCResistance(max)=1.2ohms, Freqency=100MHz, Mfg1PartNumber=BLM15HG102SN1D, OperatingTemp="-55C to 125C", Tolerance=±25%, ComponentLink1Description="Mfg1 Datasheet", ComponentLink1URL=http://www.murata.com/en-global/products/productdata/8796740223006/ENFA0024.pdf, CreationDate=5/29/2017, Creator="R. Casciola", Distributor=https://www.digikey.com/product-detail/en/murata-electronics-north-america/BLM15HG102SN1D/490-3999-1-ND/1016259, Height=0.55mm(21.7mils), LeadFree=True, MDLPartNumber=FB_000009, Mfg1=Murata, Mounting=SMT, Packaging=T&R, RoHS=True
FD1 FD2 FD3: library part FD_000001, "Fiducial, PCB Printed Copper Feature", CreationDate=9/3/2010, Creator="R. Casciola", DNI=?, LeadFree=True, MDLPartNumber=FD_000001, RoHS=True
J1 J2: library part CONN_000064, "Ultra Small Surface Mount Coaxial Connectors - 1.9mm or 2.4mm Mated Height", Mfg1PartNumber=U.FL-R-SMT-1,U.FL-R-SMT-1(10),U.FL-R-SMT-1(40), ClassName=DirectPour, ComponentLink1Description="Mfg1 Datasheet", ComponentLink1URL=http://www.hirose.co.jp/cataloge_hp/e32119372.pdf, CreationDate=7/25/2010, Creator="R. Casciola", Distributor=https://www.digikey.com/product-detail/en/hirose-electric-co-ltd/U.FL-R-SMT-1(10)/H11891CT-ND/2504612, Height=1.25mm, LeadFree=True, MDLPartNumber=CONN_000064, Mfg1=Hirose, Modifer="R. Casciola", ModificationDate=8/24/2017, Mounting=SMT, RoHS=True
J3: library part CONN_000192, "0.100\" Tiger Beam™ Cost-effective Single Beam Socket Strip", ComponentLink1Description="Mfg1 Datasheet", ComponentLink1URL=http://suddendocs.samtec.com/catalog_english/hle.pdf, CreationDate=7/27/2017, Creator="R. Casciola", DNI=?, Height=3.66mm, LeadFree=True, MDLPartNumber=CONN_000192, Mfg1=Samtec, Mfg1PartNumber=HLE-120-02-G-DV-A, Mounting=SMT, RoHS=True
J4: library part CONN_000190, "PH CONNECTOR/2.0MM Pitch Side Entry", Mfg1PartNumber=S2B-PH-SM4-TB,S2B-PH-SM4-TB(LF)(SN), ComponentLink1Description="Mfg1 Datasheet", ComponentLink1URL=http://www.jst-mfg.com/product/pdf/eng/ePH.pdf, CreationDate=7/4/2017, Creator="R. Casciola", Distributor=https://www.digikey.com/product-detail/en/jst-sales-america-inc/S2B-PH-SM4-TB(LF)(SN)/455-1749-1-ND/926846, Height=5.5mm, LeadFree=True, MDLPartNumber=CONN_000190, Mfg1=JST, Modifer="R. Casciola", ModificationDate=8/24/2017, Mounting=SMT, RoHS=True
J5: library part CONN_000017, "KK 100 HEADER ASSY FLAT VERTICAL BREAKAWAY, 1X2", BBTPartNumber=100240, Mfg2PartNumber=TSW-102-07-T-S, ComponentLink1Description="Mfg1 Datasheet", ComponentLink1URL=http://www.molex.com/pdm_docs/sd/022284023_sd.pdf, ComponentLink2Description="Mfg2 Datasheet", ComponentLink2URL=http://www.samtec.com/documents/webfiles/pdf/TSW_TH.PDF, CreationDate=7/23/2010, Creator="R. Casciola", DNI=?, Height=8.38mm, LeadFree=True, MDLPartNumber=CONN_000017, Mfg1=Molex, Mfg1PartNumber=22-28-4023, Mfg2=Samtec, Modifer="R. Casciola", ModificationDate=9/21/2010, Mounting="Through Hole", RoHS=True
L121 L122 L131: library part IND_000048, "Surface Mount Multilayer RF Chip Inductors", Case=1005(0402), Mfg1PartNumber=LQG15HS1N2S02D, OperatingTemp="-55C to 125C", Q(Freq)=8(100MHz), Tolerance=±0.3nH, ComponentLink1Description="Mfg1 Datasheet", ComponentLink1URL=http://psearch.en.murata.com/inductor/product/LQG15HS1N2S02_.pdf, CreationDate=5/29/2017, Creator="R. Casciola", Distributor=https://www.digikey.com/product-detail/en/murata-electronics-north-america/LQG15HS1N2S02D/490-2611-1-ND/662891, Height=0.55mm(21.6mils), LeadFree=True, MDLPartNumber=IND_000048, Mfg1=Murata, Mounting=SMT, Packaging=T&R, RoHS=True, SRF=6000MHz
  L131: ClassName=DirectPour
Q1 Q3 Q4: library part TRAN_000002, "Small Signal MOSFET", Case="SOT416, SC75", MaxContinuousDrainCurrent=154mA, MaxPowerDissipation=300mW, OperatingJunctionTemperatureRange="-55C to 150C", ComponentLink1Description="Mfg1 Datasheet", ComponentLink1URL=http://www.onsemi.com/pub_link/Collateral/NTA7002N-D.PDF, CreationDate=4/8/2010, Creator="R. Casciola", Distributor=https://www.digikey.com/product-detail/en/on-semiconductor/NTA7002NT1G/NTA7002NT1GOSCT-ND/1484663, Height=0.90mm(35.4mils), LeadFree=True, MaxVdss=30V, MaxVgs=±10V, MDLPartNumber=TRAN_000002, Mfg1="ON Seminconductor", Mfg1PartNumber=NTA7002NT1G, Modifer="R. Casciola", ModificationDate=5/4/2012, Mounting=SMT, Packaging=T&R, Pins=3, RoHS=True, Type="MOSFET, N-Channel, Single"
Q2: library part TRAN_000001, "Small Signal MOSFET", Case="SOT416, SC75", MaxContinuousDrainCurrent=-760mA, MaxPowerDissipation=301mW, OperatingJunctionTemperatureRange="-55C to 150C", ComponentLink1Description="Mfg1 Datasheet", ComponentLink1URL=http://www.onsemi.com/pub_link/Collateral/NTA4151P-D.PDF, CreationDate=4/8/2010, Creator="R. Casciola", Distributor=https://www.digikey.com/product-detail/en/on-semiconductor/NTA4151PT1G/NTA4151PT1GOSCT-ND/687112, Height=0.90mm(35.4mils), LeadFree=True, MaxVdss=-20V, MaxVgs=±6V, MDLPartNumber=TRAN_000001, Mfg1="ON Seminconductor", Mfg1PartNumber=NTA4151PT1G, Mounting=SMT, Packaging=T&R, Pins=3, RoHS=True, Type="MOSFET, P-Channel, Single"
R1 R2 R23 R29 R30: library part RES_000067, "Chip Resistor, Thick Film", Case=1005(0402), LE Voltage=50V, Mfg1PartNumber=CRCW0402100KFKED, OperatingTemp="-55C to 155C", Power=0.063W, Tempco=±100ppm/C, Tolerance=±1%, ComponentLink1Description="Mfg1 Datasheet", ComponentLink1URL=http://www.vishay.com/docs/20035/dcrcwe3.pdf, Composition="Thick Film", CreationDate=12/22/2010, Creator="R. Casciola", Distributor=https://www.digikey.com/product-detail/en/vishay-dale/CRCW0402100KFKED/541-100KLCT-ND/1183351, Height=0.40mm(15.7mils), LeadFree=True, MDLPartNumber=RES_000067, Mfg1=Vishay/Dale, Mounting=SMT, Packaging=T&R, RoHS=True
R3: library part RES_000296, "Chip Resistor, Thick Film", Case=1005(0402), LE Voltage=50V, Mfg1PartNumber=CRCW04023K60FKED, OperatingTemp="-55C to 155C", Power=0.063W, Tempco=±100ppm/C, Tolerance=±1%, ComponentLink1Description="Mfg1 Datasheet", ComponentLink1URL=http://www.vishay.com/docs/20035/dcrcwe3.pdf, Composition="Thick Film", CreationDate=8/22/2017, Creator="R. Casciola", Distributor=https://www.digikey.com/product-detail/en/vishay-dale/CRCW04023K60FKED/541-3.60KLCT-ND/1183185, Height=0.40mm(15.7mils), LeadFree=True, MDLPartNumber=RES_000296, Mfg1=Vishay/Dale, Mounting=SMT, Packaging=T&R, RoHS=True
R4: library part RES_000253, "Chip Resistor, Thick Film", Case=1005(0402), LE Voltage=50V, Mfg1PartNumber=CRCW04023K40FKED, OperatingTemp="-55C to 155C", Power=0.063W, Tempco=±100ppm/C, Tolerance=±1%, ComponentLink1Description="Mfg1 Datasheet", ComponentLink1URL=http://www.vishay.com/docs/20035/dcrcwe3.pdf, Composition="Thick Film", CreationDate=2/18/2015, Creator="R. Casciola", Distributor=https://www.digikey.com/product-detail/en/vishay-dale/CRCW04023K40FKED/541-3.40KLCT-ND/1183182, Height=0.40mm(15.7mils), LeadFree=True, MDLPartNumber=RES_000253, Mfg1=Vishay/Dale, Mounting=SMT, Packaging=T&R, RoHS=True
R5 R6 R11 R24 R25 R26 R27: library part RES_000288, "Chip Resistor, Thick Film", Case=1005(0402), LE Voltage=50V, Mfg1PartNumber=CRCW04021K80FKED, Mfg2PartNumber=RC0402FR-071K8L, OperatingTemp="-55C to 155C", Power=0.063W, Tempco=±100ppm/°C, Tolerance=±1%, ComponentLink1Description="Mfg1 Datasheet", ComponentLink1URL=http://www.vishay.com/docs/20035/dcrcwe3.pdf, ComponentLink2Description="Mfg2 Datasheet", ComponentLink2URL=http://www.yageo.com/NewPortal/yageodocoutput?fileName=/pdf/R-Chip/PYu-RC_Group_51_RoHS_L_5.pdf, Composition="Thick Film", CreationDate=7/23/2017, Creator="R. Casciola", Distributor=https://www.digikey.com/product-detail/en/vishay-dale/CRCW04021K80FKED/541-1.80KLCT-ND/1183150, Height=0.40mm(15.7mils), LeadFree=True, MDLPartNumber=RES_000288, Mfg1=Vishay/Dale, Mfg2=Yageo, Mounting=SMT, Packaging=T&R, RoHS=True
R7 R14: library part RES_000005, "Chip Resistor, Thick Film", Case=1005(0402), LE Voltage=50V, Mfg1PartNumber=CRCW040210K0FKED, OperatingTemp="-55C to 155C", Power=0.063W, Tempco=±100ppm/C, Tolerance=±1%, ComponentLink1Description="Mfg1 Datasheet", ComponentLink1URL=http://www.vishay.com/docs/20035/dcrcwe3.pdf, Composition="Thick Film", CreationDate=4/13/2010, Creator="R. Casciola", Distributor=https://www.digikey.com/product-detail/en/vishay-dale/CRCW040210K0FKED/541-10.0KLCT-ND/1183237, Height=0.40mm(15.7mils), LeadFree=True, MDLPartNumber=RES_000005, Mfg1=Vishay/Dale, Mounting=SMT, Packaging=T&R, RoHS=True
R8 R9 R10 R12: library part RES_000064, "Chip Resistor, Thick Film", Case=1005(0402), CreationDate=12/4/2010, Creator="R. Casciola", DNI=?, LeadFree=True, MDLPartNumber=RES_000064, Mounting=SMT, RoHS=True
R13 R17 R20 R31 R32: library part RES_000003, "Chip Resistor, Thick Film", Case=1005(0402), LE Voltage=50V, Mfg1PartNumber=CRCW04024K99FKED, OperatingTemp="-55C to 155C", Power=0.063W, Tempco=±100ppm/C, Tolerance=±1%, ComponentLink1Description="Mfg1 Datasheet", ComponentLink1URL=http://www.vishay.com/docs/20035/dcrcwe3.pdf, Composition="Thick Film", CreationDate=4/6/2010, Creator="R. Casciola", Distributor=https://www.digikey.com/product-detail/en/vishay-dale/CRCW04024K99FKED/541-4.99KLCT-ND/1183202, Height=0.40mm(15.7mils), LeadFree=True, MDLPartNumber=RES_000003, Mfg1=Vishay/Dale, Mounting=SMT, Packaging=T&R, RoHS=True
R15: library part RES_000103, "Chip Resistor, Thick Film", Case=1005(0402), LE Voltage=50V, Mfg1PartNumber=CRCW0402680KFKED, OperatingTemp="-55C to 155C", Power=0.063W, Tempco=±100ppm/C, Tolerance=±1%, ComponentLink1Description="Mfg1 Datasheet", ComponentLink1URL=http://www.vishay.com/docs/20035/dcrcwe3.pdf, Composition="Thick Film", CreationDate=5/25/2011, Creator="R. Casciola", Distributor=https://www.digikey.com/product-detail/en/vishay-dale/CRCW0402680KFKED/541-680KLCT-ND/1183446, Height=0.40mm(15.7mils), LeadFree=True, MDLPartNumber=RES_000103, Mfg1=Vishay/Dale, Mounting=SMT, Packaging=T&R, RoHS=True
R16: library part RES_000165, "Chip Resistor, Thick Film", Case=1005(0402), LE Voltage=50V, Mfg1PartNumber=CRCW0402240KFKED, OperatingTemp="-55C to 155C", Power=0.063W, Tempco=±100ppm/C, Tolerance=±1%, ComponentLink1Description="Mfg1 Datasheet", ComponentLink1URL=http://www.vishay.com/docs/20035/dcrcwe3.pdf, Composition="Thick Film", CreationDate=1/6/2012, Creator="R. Casciola", Distributor=https://www.digikey.com/product-detail/en/vishay-dale/CRCW0402240KFKED/541-240KLCT-ND/1183392, Height=0.40mm(15.7mils), LeadFree=True, MDLPartNumber=RES_000165, Mfg1=Vishay/Dale, Mounting=SMT, Packaging=T&R, RoHS=True
R18: library part RES_000287, "Chip Resistor, Thick Film", Case=1005(0402), LE Voltage=50V, Mfg1PartNumber=CRCW0402191RFKED, Mfg2PartNumber=RC0402FR-07191RL, OperatingTemp="-55C to 155C", Power=0.063W, Tempco=±100ppm/°C, Tolerance=±1%, ComponentLink1Description="Mfg1 Datasheet", ComponentLink1URL=http://www.vishay.com/docs/20035/dcrcwe3.pdf, ComponentLink2Description="Mfg2 Datasheet", ComponentLink2URL=http://www.yageo.com/documents/recent/PYu-RC_Group_51_RoHS_L_7.pdf, Composition="Thick Film", CreationDate=7/23/2017, Creator="R. Casciola", Distributor=https://www.digikey.com/product-detail/en/vishay-dale/CRCW0402191RFKED/541-191LCT-ND/1183039, Height=0.40mm(15.7mils), LeadFree=True, MDLPartNumber=RES_000287, Mfg1=Vishay/Dale, Mfg2=Yageo, Mounting=SMT, Packaging=T&R, RoHS=True
R19: library part RES_000286, "Chip Resistor, Thick Film", Case=1005(0402), LE Voltage=50V, Mfg1PartNumber=CRCW0402160RFKED, Mfg2PartNumber=RC0402FR-07160RL, OperatingTemp="-55C to 155C", Power=0.063W, Tempco=±100ppm/°C, Tolerance=±1%, ComponentLink1Description="Mfg1 Datasheet", ComponentLink1URL=http://www.vishay.com/docs/20035/dcrcwe3.pdf, ComponentLink2Description="Mfg2 Datasheet", ComponentLink2URL=http://www.yageo.com/documents/recent/PYu-RC_Group_51_RoHS_L_7.pdf, Composition="Thick Film", CreationDate=7/23/2017, Creator="R. Casciola", Distributor=https://www.digikey.com/product-detail/en/vishay-dale/CRCW0402160RFKED/541-160LCT-ND/1183030, Height=0.40mm(15.7mils), LeadFree=True, MDLPartNumber=RES_000286, Mfg1=Vishay/Dale, Mfg2=Yageo, Mounting=SMT, Packaging=T&R, RoHS=True
R21: library part RES_000158, "Chip Resistor, Thick Film", Case=1005(0402), LE Voltage=50V, Mfg1PartNumber=CRCW040222R0FKED, OperatingTemp="-55C to 155C", Power=0.063W, Tempco=±100ppm/C, Tolerance=±1%, ComponentLink1Description="Mfg1 Datasheet", ComponentLink1URL=http://www.vishay.com/docs/20035/dcrcwe3.pdf, Composition="Thick Film", CreationDate=10/28/2011, Creator="R. Casciola", Distributor=https://www.digikey.com/product-detail/en/vishay-dale/CRCW040222R0FKED/541-22.0LCT-ND/1182931, Height=0.40mm(15.7mils), LeadFree=True, MDLPartNumber=RES_000158, Mfg1=Vishay/Dale, Mounting=SMT, Packaging=T&R, RoHS=True
R171: library part RES_000185, "Chip Resistor, Thick Film", Case=1005(0402), LE Voltage=50V, Mfg1PartNumber=CRCW040256K0FKED, OperatingTemp="-55C to 155C", Power=0.063W, Tempco=±100ppm/C, Tolerance=±1%, ComponentLink1Description="Mfg1 Datasheet", ComponentLink1URL=http://www.vishay.com/docs/20035/dcrcwe3.pdf, Composition="Thick Film", CreationDate=10/15/2012, Creator="R. Casciola", Distributor=https://www.digikey.com/product-detail/en/vishay-dale/CRCW040256K0FKED/541-56.0KLCT-ND/1183322, Height=0.40mm(15.7mils), LeadFree=True, MDLPartNumber=RES_000185, Mfg1=Vishay/Dale, Mounting=SMT, Packaging=T&R, RoHS=True
S1: library part SWCH_000001, "KMR 2 Series Microminiature SMT Top Actuated", ContactResistance=1mohm, CurrentRating=50mA, InsulationResistance=1Gohm, MinimumCurrent=1mA, OperatingTemperature="-40C to 85C", VoltageRating=32VDC, Action=Pushbutton, BounceTime=3ms, ComponentLink1Description="Mfg1 Datasheet", ComponentLink1URL=http://www.ck-components.com/14414/kmr2_8apr.pdf/, Contacts="SPST, N.O.", CreationDate=5/5/2010, Creator="R. Casciola", Distributor=https://www.digikey.com/product-detail/en/c-k/KMR221GLFS/401-1427-1-ND/550466, Function=Momentary, Height=2.10mm(82.7mils), LeadFree=True, MDLPartNumber=SWCH_000001, Mfg1=C&K, Mfg1PartNumber=KMR221GLFS, Modifer="R. Casciola", ModificationDate=8/8/2010, Mounting=SMT, Packaging=T&R, RoHS=True
TP1 TP2 TP3 TP4 TP5 TP6 TP7: library part TP_000015, "Test Point", CreationDate=11/16/2010, Creator="R. Casciola", DNI=?, LeadFree=True, MDLPartNumber=TP_000015, RoHS=True
U1: library part IC_000287, "Low-Cost Low-Power 2.4 GHz RF Transceiver", Case=QFN20, Mfg1PartNumber=CC2500RGP,CC2500RGPR, OperatingTemp="-40C to 85C", ComponentLink1Description="Mfg1 Datasheet", ComponentLink1URL=http://www.ti.com/lit/ds/symlink/cc2500.pdf, CreationDate=5/29/2017, Creator="R. Casciola", Distributor=https://www.digikey.com/product-detail/en/texas-instruments/CC2500RGPR/296-38562-1-ND/5034436, Height=1.00mm(39.4mils), LeadFree=True, MDLPartNumber=IC_000287, Mfg1="Texas Instruments", Mounting=SMT, Packaging=T&R, PartMarking=CC2500, Pins=20, RoHS=True